# Altium PCB PCB1.PcbDoc
Units mil, origin at the board's own origin, x right, y up, seen from the top; angles counter-clockwise.
Board outline 6000 x 4000 mil, 2 copper layers (Top Layer, Bottom Layer); 5 components, 0 nets, 113 pads, 0 vias.
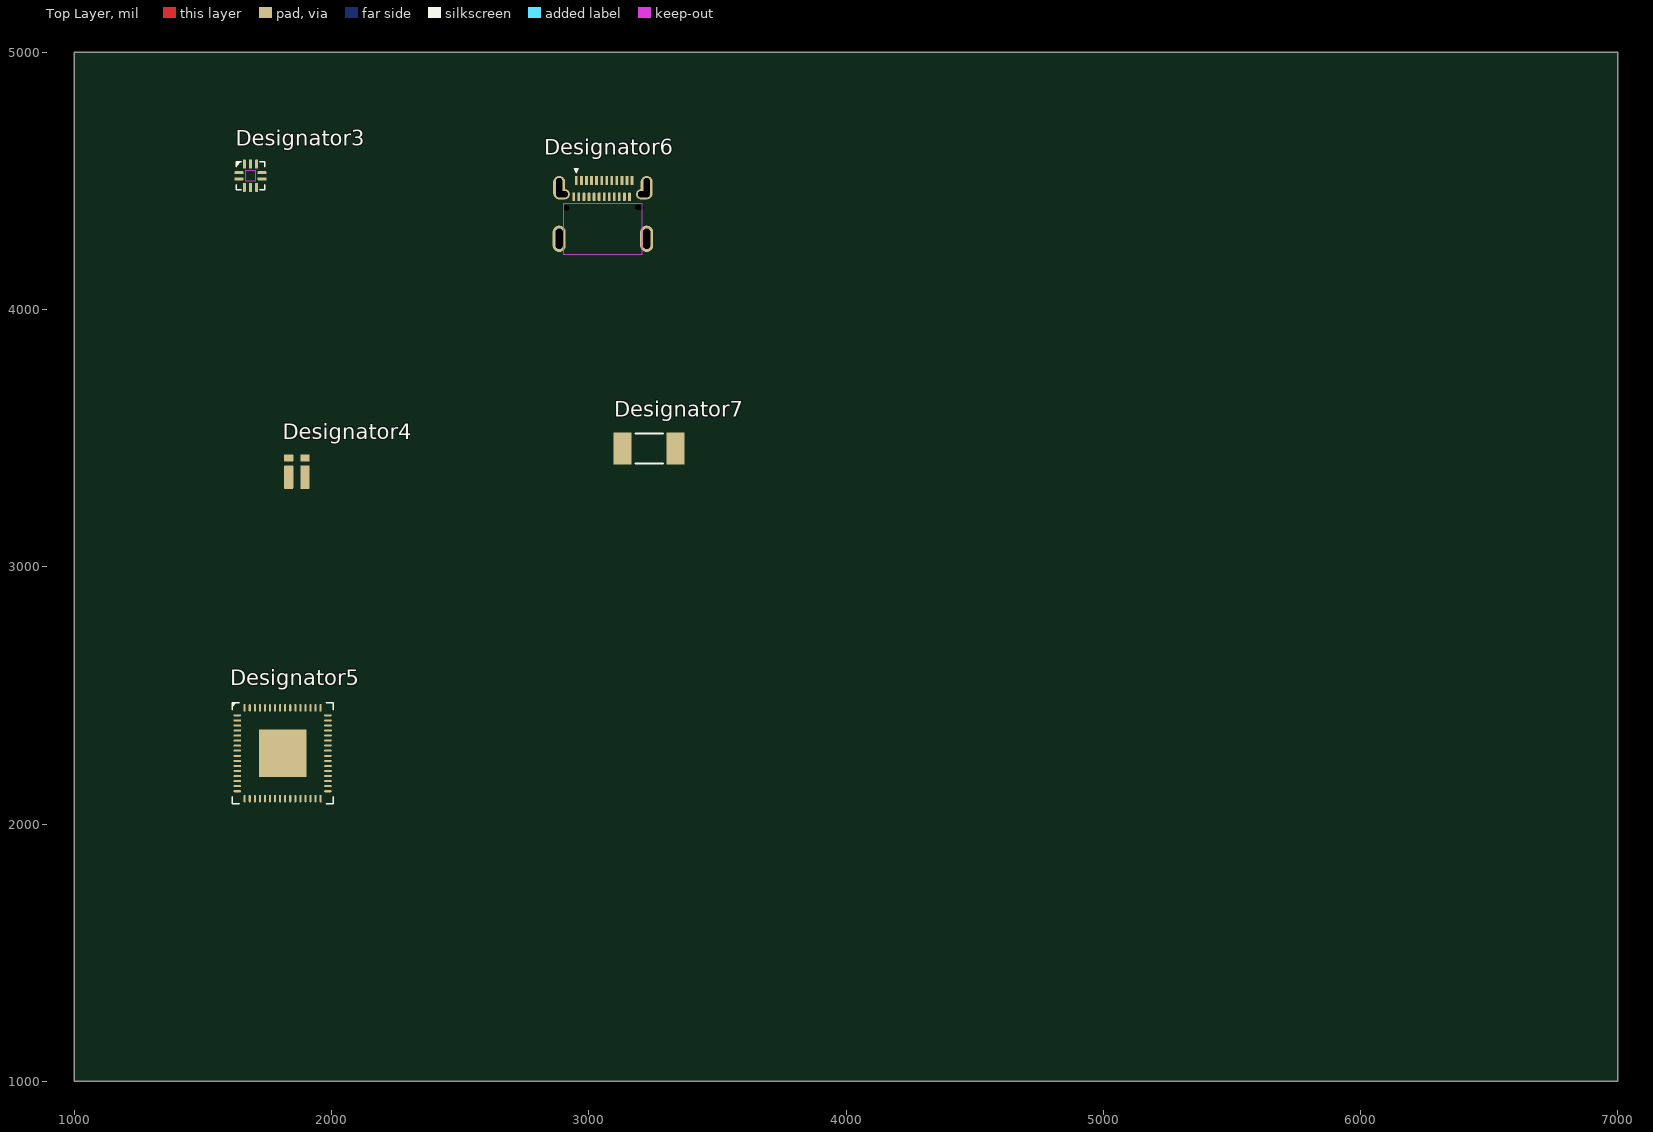
[diagram p0: Top Layer view]
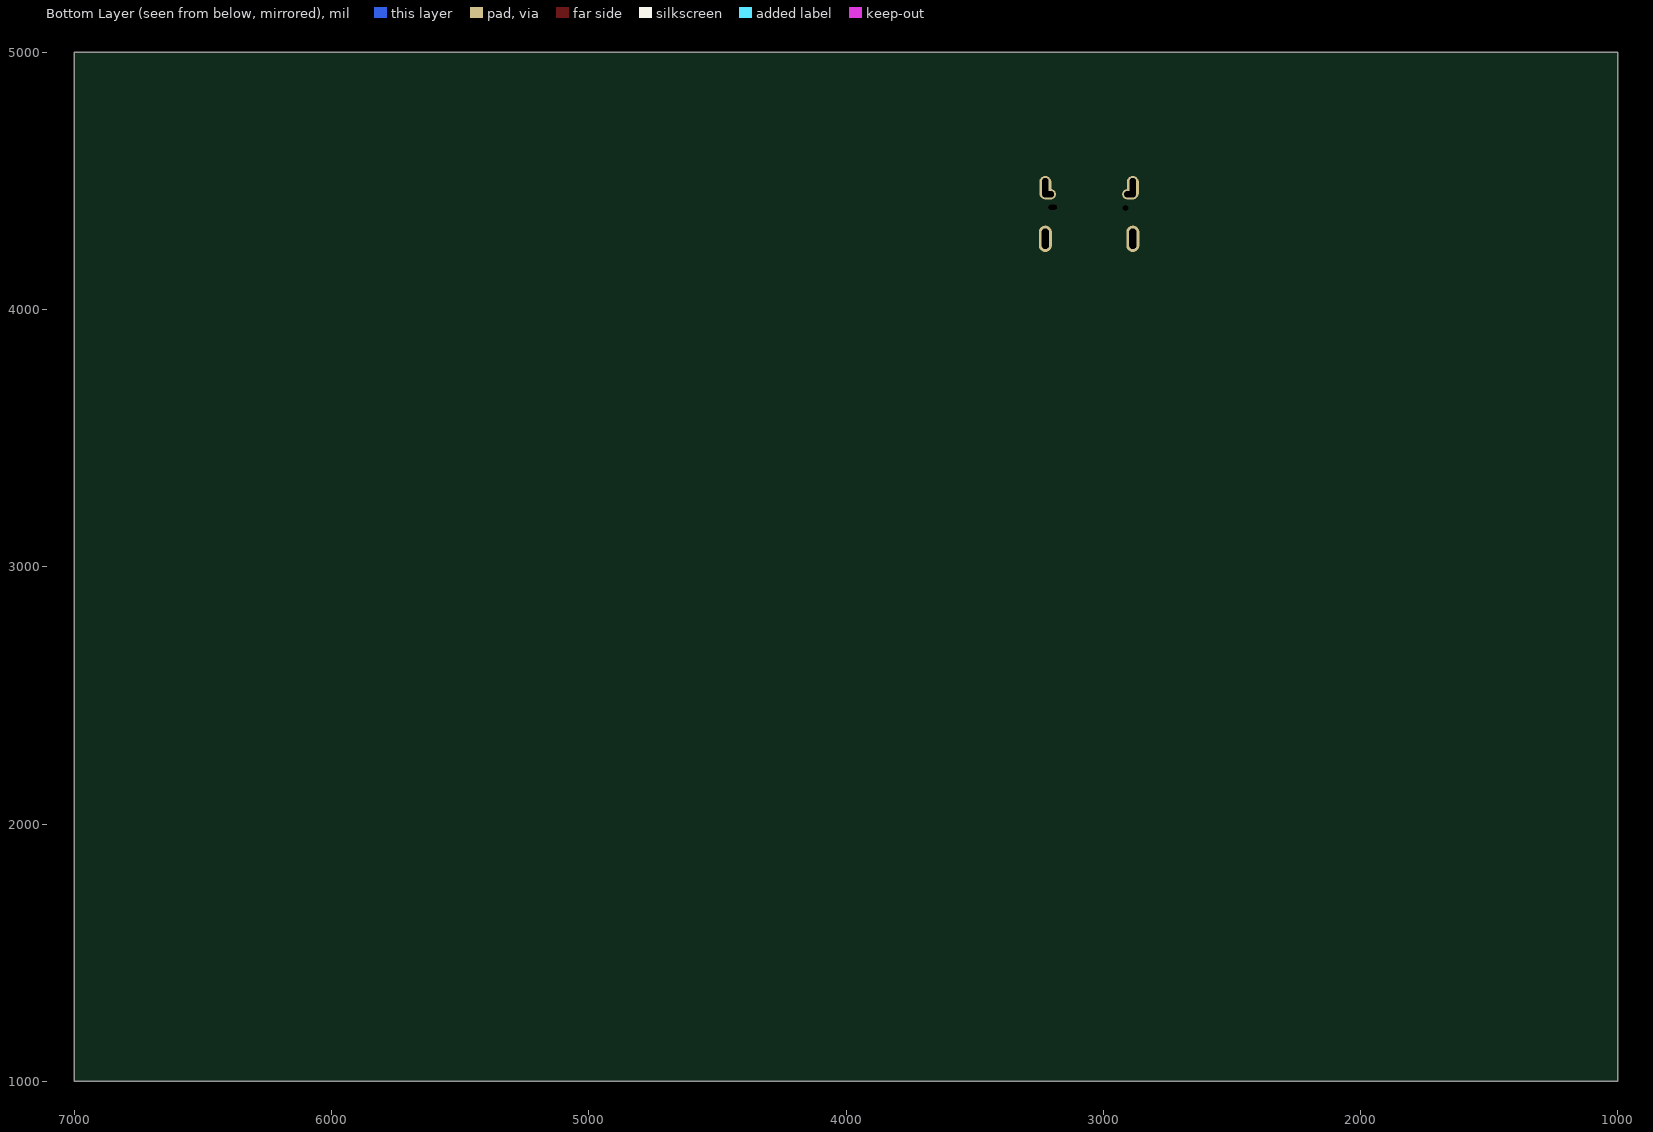
[diagram p1: Bottom Layer view, seen from below]

## Layer stack, top to bottom
Top Solder: solder mask 0.4, Solder Resist, Dk 3.5
Top Layer: signal copper 1.4
Dielectric 1: dielectric 12.6, FR-4, Dk 4.8
Bottom Layer: signal copper 1.4
Bottom Solder: solder mask 0.4, Solder Resist, Dk 3.5

## Board outline
1000,1000 7000,1000 7000,5000 1000,5000

## Design rules (kind name [scope] priority, off if disabled: settings)
Clearance [All] p1: gap=10 ignorepadtopadclearanceinfootprint=FALSE except(0: Arc-Hole Track-Hole SMDPad-Hole THPad-Hole Via-Hole Fill-Hole Poly-Hole Region-Hole Text-Hole)
PolygonConnect [All] p1: connectstyle=Relief reliefconductorwidth=10 reliefentries=4 polygonreliefangle="90 Angle" airgapwidth=10
RoutingVias [All] p1: holewidth=28 width=50 viastyle="Through Hole" minholewidth=28 minwidth=50 maxholewidth=28 maxwidth=50
SolderMaskExpansion [All] p1: expansion=4 istentingtop=FALSE
Width [All] p1: maxlimit=10 minlimit=10 preferedwidth=10
30 further rules are at their usual default settings.

## Components (designator, comment, footprint, x,y, rotation, side; value= is the part's Value field where it differs from the comment)
Designator3 "Comment" STM-LGA-10 1685,4520 r0 top
Designator4 "Comment" SUSUMU-3216T4A 1865,3370 r0 top
Designator5 "Comment" MCHP-QFN-64-4700X4700TP 1810,2275 r0 top
Designator6 "Comment" JAE-DX07S024JJ3_V 3055,4395 r0 top
Designator7 "Comment" LFUS-1812L050_V 3235,3460 r0 top

## Footprints (in the part's own frame and the unit in brackets; to place one, negate y for a bottom-side part, rotate by r counter-clockwise, add the part's x,y. Pads: shape width x height; smd on the part's side, far side on the other; paste and mask are expansions set on the pad)
JAE-DX07S024JJ3_V [mm] "THD, 24-Leads, Body 8.17x8.94mm, Pitch 0.5mm"
  oval 1.2x2.3 hole 0.6 slot 1.9 at 90 deg: 1(-4.32,2) 2(4.32,2)
  oval 1.5x1 hole 0.6 slot 1.1 at 0 deg: 1(-4.02,1.35) 2(4.02,1.35)
  oval 1.3x2.6 hole 0.7 slot 2 at 90 deg: 3(-4.32,-3.05) 4(4.32,-3.05)
  rrect25% 0.27x0.9 smd: A1(-2.625,2.7) A2(-2.125,2.7) A3(-1.625,2.7) A4(-1.125,2.7) A5(-0.625,2.7) A6(-0.125,2.7) A7(0.375,2.7) A8(0.875,2.7) A9(1.375,2.7) A10(1.875,2.7) A11(2.375,2.7) A12(2.875,2.7)
  rrect25% 0.27x0.8 smd: B1(2.625,1.1) B2(2.125,1.1) B3(1.625,1.1) B4(1.125,1.1) B5(0.625,1.1) B6(0.125,1.1) B7(-0.375,1.1) B8(-0.875,1.1) B9(-1.375,1.1) B10(-1.875,1.1) B11(-2.375,1.1) B12(-2.875,1.1)
  round 0 hole 0.6 unplated: H1(-3.6,0)
  round 0 hole 0.5 slot 0.85 at 0 deg unplated: H2(3.6,0.065)
  Top Layer keep-out region: -3.9,-4.55 3.9,-4.55 3.9,0.4 -3.9,0.4
  silkscreen extent -2.83,3.49 -2.43,3.89, body extent -4.47,-5.35 4.47,2.8, height 3.16
LFUS-1812L050_V [mm] "Chip Fuse, 2-Leads, Body 4.73x3.41mm"
  rect 1.78x3.15 smd: 1(-2.615,0) 2(2.615,0)
  silkscreen extent -1.35,-1.47 1.35,1.48, body extent -2.36,-1.71 2.36,1.71, height 0.75
MCHP-QFN-64-4700X4700TP [mm] "QFN, 64-Leads, Body 9.1x9.1mm, Pitch 0.5mm, Thermal Pad 4.7x4.7mm"
  oval 0.75x0.2 smd: 1(-4.475,3.75) 2(-4.475,3.25) 3(-4.475,2.75) 4(-4.475,2.25) 5(-4.475,1.75) 6(-4.475,1.25) 7(-4.475,0.75) 8(-4.475,0.25) 9(-4.475,-0.25) 10(-4.475,-0.75) 11(-4.475,-1.25) 12(-4.475,-1.75) 13(-4.475,-2.25) 14(-4.475,-2.75) 15(-4.475,-3.25) 16(-4.475,-3.75) 33(4.475,-3.75) 34(4.475,-3.25) 35(4.475,-2.75) 36(4.475,-2.25) 37(4.475,-1.75) 38(4.475,-1.25) 39(4.475,-0.75) 40(4.475,-0.25) 41(4.475,0.25) 42(4.475,0.75) 43(4.475,1.25) 44(4.475,1.75) 45(4.475,2.25) 46(4.475,2.75) 47(4.475,3.25) 48(4.475,3.75)
  oval 0.2x0.75 smd: 17(-3.75,-4.475) 18(-3.25,-4.475) 19(-2.75,-4.475) 20(-2.25,-4.475) 21(-1.75,-4.475) 22(-1.25,-4.475) 23(-0.75,-4.475) 24(-0.25,-4.475) 25(0.25,-4.475) 26(0.75,-4.475) 27(1.25,-4.475) 28(1.75,-4.475) 29(2.25,-4.475) 30(2.75,-4.475) 31(3.25,-4.475) 32(3.75,-4.475) 49(3.75,4.475) 50(3.25,4.475) 51(2.75,4.475) 52(2.25,4.475) 53(1.75,4.475) 54(1.25,4.475) 55(0.75,4.475) 56(0.25,4.475) 57(-0.25,4.475) 58(-0.75,4.475) 59(-1.25,4.475) 60(-1.75,4.475) 61(-2.25,4.475) 62(-2.75,4.475) 63(-3.25,4.475) 64(-3.75,4.475)
  rect 4.7x4.7 smd: 65(0,0)
  silkscreen extent -5,-5 5,5, body extent -4.51,-4.51 4.51,4.51, height 0.9
STM-LGA-10 [mm] "LGA, 10-Leads, Body 2.5x2.5mm, Pitch 0.6mm"
  rrect50% 0.9x0.3 smd: 1(-1.145,0.3) 2(-1.145,-0.3) 6(1.145,-0.3) 7(1.145,0.3)
  rrect50% 0.3x0.9 smd: 3(-0.6,-1.145) 4(0,-1.145) 5(0.6,-1.145) 8(0.6,1.145) 9(0,1.145) 10(-0.6,1.145)
  Top Layer keep-out region: -0.5,-0.5 0.5,-0.5 0.5,0.5 -0.5,0.5
  silkscreen extent -1.4,-1.4 1.4,1.4, body extent -1.25,-1.25 1.25,1.25, height 0.8
SUSUMU-3216T4A [mm] "SMD, 4-Leads, Body 3.2x1.6mm"
  rrect15% 0.9x2.3 smd: 1(-0.8,-0.55) 2(0.8,-0.55)
  rrect20% 0.9x0.7 smd: 3(-0.8,1.35) 4(0.8,1.35)
  body extent -0.8,-1.6 0.8,1.6, height 0.55

## Nets (pads, with @x,y where several pads share a name; then routed paths per layer and width w, separated by ;. In a path a pad name is that pad's centre, name@x,y a point inside that pad or via, vN(x,y) a via of type N, cw(c..) or ccw(c..) an arc to the next point about the centre after c; other vN are vias at no path point)
pads on no net: Designator3.1 Designator3.2 Designator3.3 Designator3.4 Designator3.5 Designator3.6 Designator3.7 Designator3.8 Designator3.9 Designator3.10 Designator4.1 Designator4.2 Designator4.3 Designator4.4 Designator5.1 Designator5.2 Designator5.3 Designator5.4 Designator5.5 Designator5.6 Designator5.7 Designator5.8 Designator5.9 Designator5.10 Designator5.11 Designator5.12 Designator5.13 Designator5.14 Designator5.15 Designator5.16 Designator5.17 Designator5.18 Designator5.19 Designator5.20 Designator5.21 Designator5.22 Designator5.23 Designator5.24 Designator5.25 Designator5.26 Designator5.27 Designator5.28 Designator5.29 Designator5.30 Designator5.31 Designator5.32 Designator5.33 Designator5.34 Designator5.35 Designator5.36 Designator5.37 Designator5.38 Designator5.39 Designator5.40 Designator5.41 Designator5.42 Designator5.43 Designator5.44 Designator5.45 Designator5.46 Designator5.47 Designator5.48 Designator5.49 Designator5.50 Designator5.51 Designator5.52 Designator5.53 Designator5.54 Designator5.55 Designator5.56 Designator5.57 Designator5.58 Designator5.59 Designator5.60 Designator5.61 Designator5.62 Designator5.63 Designator5.64 Designator5.65 Designator6.1 Designator6.2 Designator6.3 Designator6.4 Designator6.A1 Designator6.A2 Designator6.A3 Designator6.A4 Designator6.A5 Designator6.A6 Designator6.A7 Designator6.A8 Designator6.A9 Designator6.A10 Designator6.A11 Designator6.A12 Designator6.B1 Designator6.B2 Designator6.B3 Designator6.B4 Designator6.B5 Designator6.B6 Designator6.B7 Designator6.B8 Designator6.B9 Designator6.B10 Designator6.B11 Designator6.B12 Designator6.H1 Designator6.H2 Designator7.1 Designator7.2

## Text inside footprints (layer, text, board x,y; h text height)
Designator6: Top 3D Body "Board Edge" at 3011.69,4186.34 h19.68